# Altium PCB PCB(无CH340).pcbdoc
Units mil, origin at the board's own origin, x right, y up, seen from the top; angles counter-clockwise.
Board outline 3337 x 2275.93 mil, 2 copper layers (Top Layer, Bottom Layer); 49 components, 44 nets, 174 pads, 47 vias.
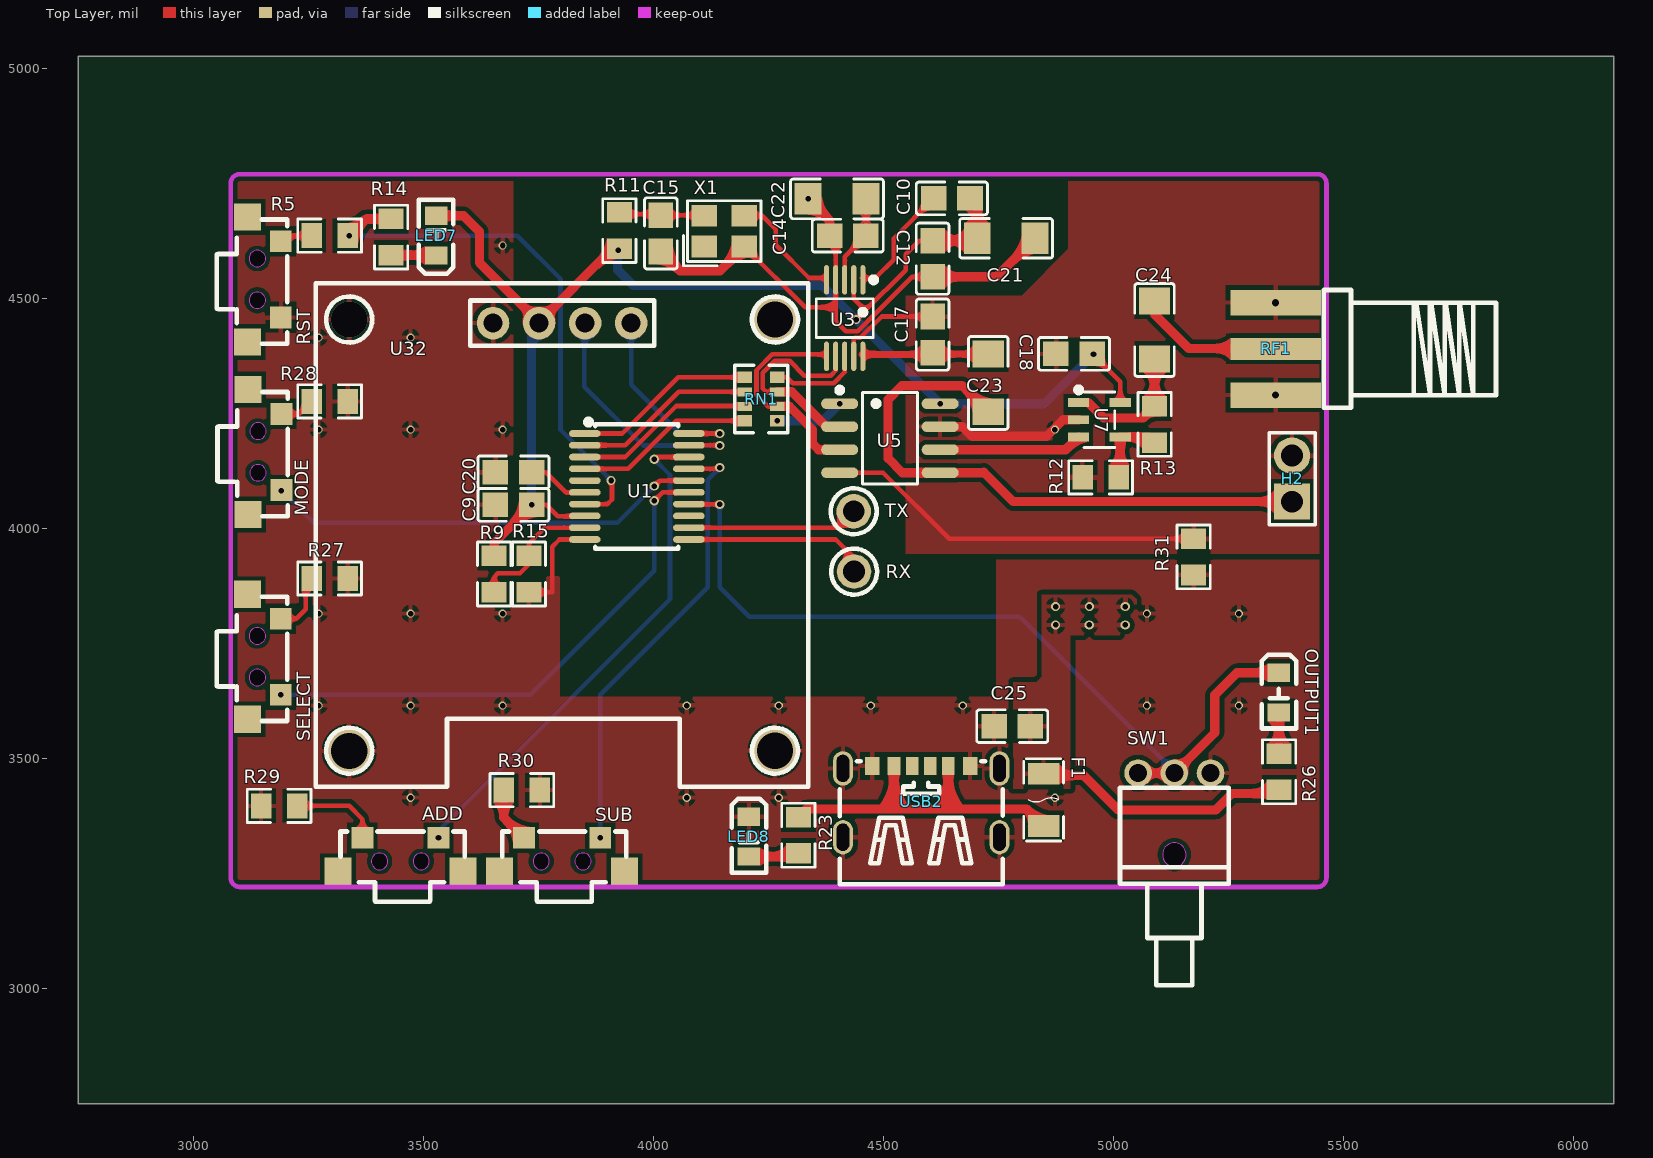
[diagram p0: Top Layer view]
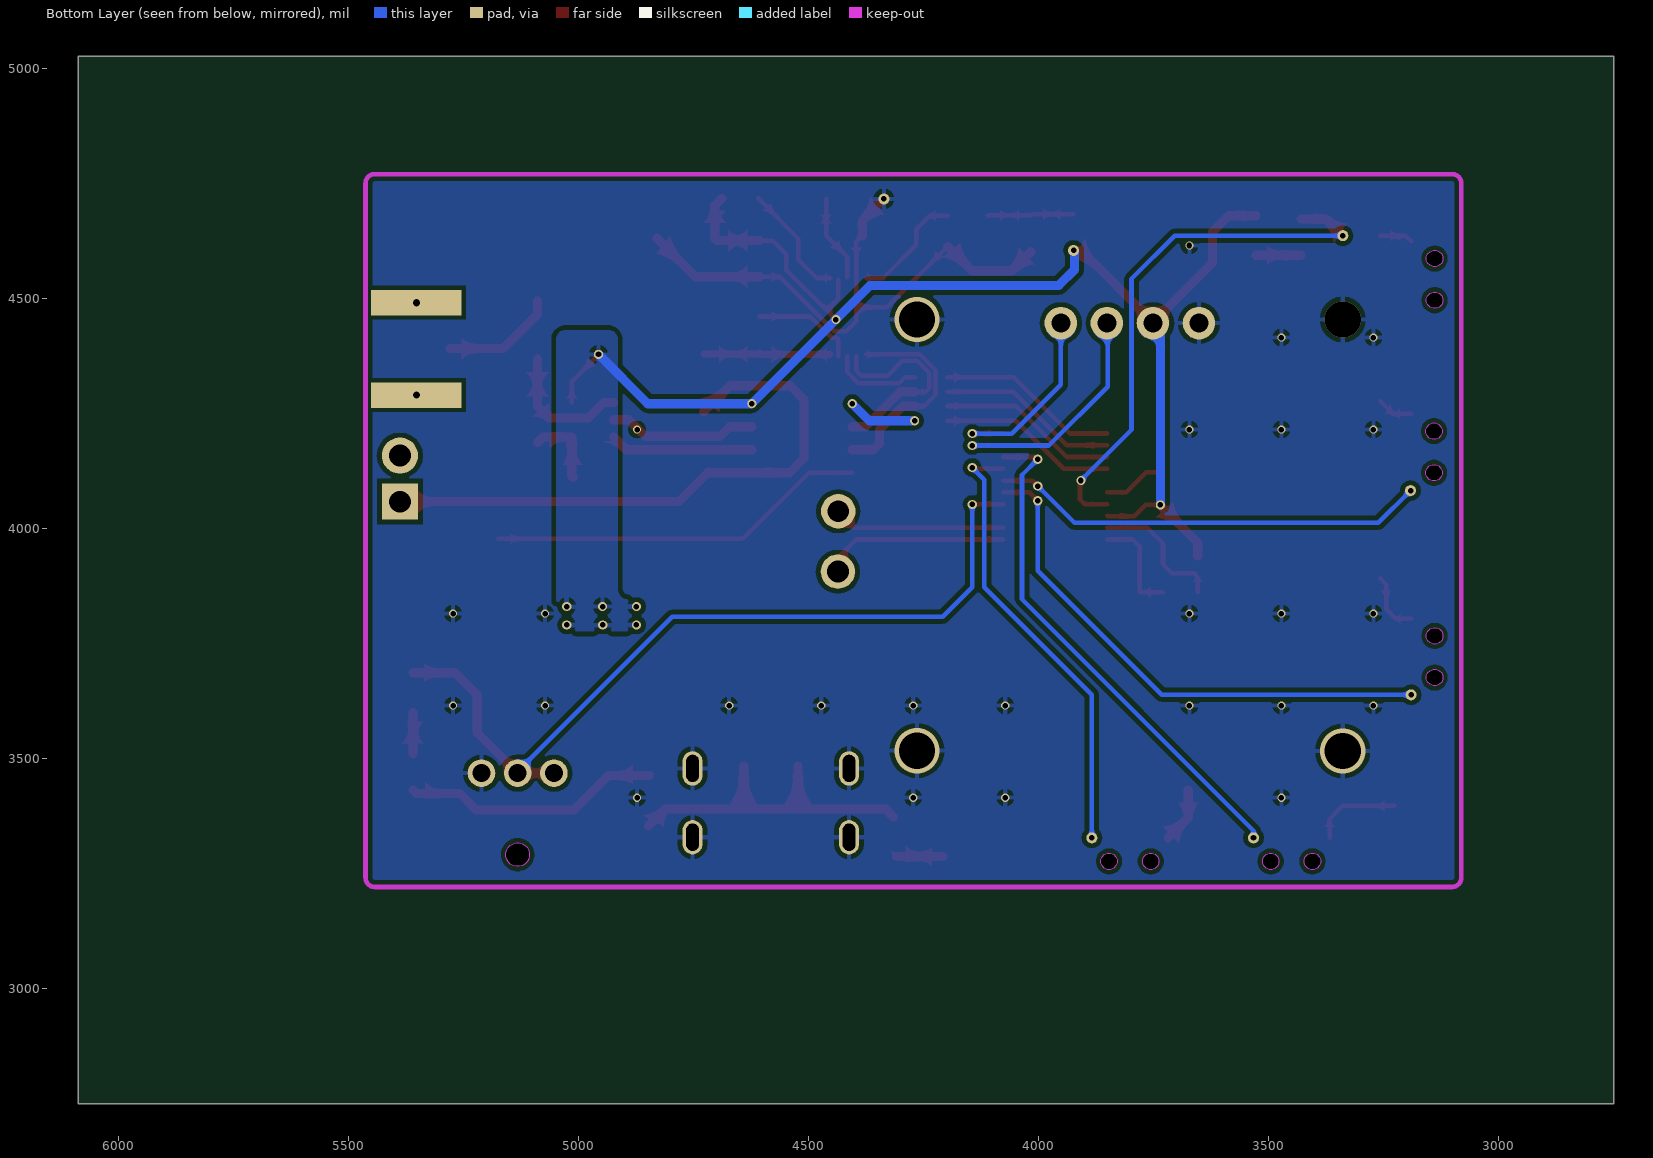
[diagram p1: Bottom Layer view, seen from below]

## Layer stack, top to bottom
Top Solder Mask Layer: solder mask 0.4, Solder Resist, Dk 3.5
Top Layer: signal copper 1.4
Dielectric1: dielectric 12.6, FR-4, Dk 4.8
Bottom Layer: signal copper 1.4
Bottom Solder Mask Layer: solder mask 0.4, Solder Resist, Dk 3.5

## Board outline
6087,2750 2750,2750 2750,5025.93 6087,5025.93

## Design rules (kind name [scope] priority, off if disabled: settings)
Clearance [All] p1: gap=10 ignorepadtopadclearanceinfootprint=FALSE except(0: Arc-Hole Track-Hole SMDPad-Hole THPad-Hole Via-Hole Fill-Hole Poly-Hole Region-Hole Text-Hole)
PolygonConnect [All] p1: connectstyle=Relief reliefconductorwidth=10 reliefentries=4 polygonreliefangle="90 Angle" airgapwidth=10
RoutingVias [All] p1: holewidth=28 width=50 viastyle="Through Hole" minholewidth=28 minwidth=50 maxholewidth=28 maxwidth=50
SolderMaskExpansion [All] p1: expansion=4 istentingtop=FALSE
Width [All] p1: maxlimit=10 minlimit=10 preferedwidth=10
30 further rules are at their usual default settings.

## Components (designator, comment, footprint, x,y, rotation, side; value= is the part's Value field where it differs from the comment)
ADD "TS-1087B-B2D2" KEY-SMD_4P-L7.8-W2.8-P4.20-EH 3450.23,3290.93 r180 top
C9 "0805B104K500NT" C0805 3695.86,4050.93 r0 top
C10 "0805B104K500NT" C0805 4648.64,4717.02 r180 top
C12 "0805B104K500NT" C0805 4606.72,4585.93 r90 top
C14 "0805B104K500NT" C0805 4422.33,4635.93 r0 top
C15 "0805B104K500NT" C0805 4016.16,4640.93 r90 top
C17 "0805B104K500NT" C0805 4606.72,4420.93 r270 top
C18 "0805B104K500NT" C0805 4914,4379.2 r180 top
C20 "0805B104K500NT" C0805 3695.86,4121.76 r0 top
C21 "CL31A106KBHNNNE" C1206 4766.48,4630.22 r180 top
C22 "CL31A106KBHNNNE" C1206 4399,4715.93 r0 top
C23 "CL31A106KBHNNNE" C1206 4727.64,4315.93 r270 top
C24 "CL31A106KBHNNNE" C1206 5089,4430.93 r90 top
C25 "0805B104K500NT" C0805 4779.75,3569.93 r0 top
F1 "nSMD010" F1206 4848,3409.93 r270 top
H2 "PZ254V-11-02P" HDR-TH_2P-P2.54-V-M 5388,4108 r90 top
LED7 "LED_B" LED_0805 3528,4638.06 r90 top
LED8 "LED_B" LED_0805 4207.22,3327.89 r270 top
MODE "TS-1087B-B2D2" KEY-SMD_4P-L7.8-W2.8-P4.20-EH 3155.3,4165.93 r90 top
OUTPUT1 "LED_B" LED_0805 5359,3640.9 r270 top
R5 "0805W8F1001T5E" R0805 3296.33,4635.93 r0 top
R9 "0805W8F1001T5E" R0805 3654,3900.73 r270 top
R11 "0805W8F1001T5E" R0805 3926,4647.14 r90 top
R12 "0805W8F1001T5E" R0805 4972.04,4110.93 r0 top
R13 "0805W8F1001T5E" R0805 5089,4225.81 r90 top
R14 "0805W8F1001T5E" R0805 3430,4632.96 r90 top
R15 "0805W8F1001T5E" R0805 3729.63,3900.73 r270 top
R23 "0805W8F1001T5E" R0805 4315.23,3333 r90 top
R26 "0805W8F1001T5E" R0805 5359.68,3470.93 r270 top
R27 "0805W8F1001T5E" R0805 3296.33,3890.93 r180 top
R28 "0805W8F1001T5E" R0805 3296.33,4275.93 r180 top
R29 "0805W8F1001T5E" R0805 3186.62,3396.93 r0 top
R30 "0805W8F1001T5E" R0805 3714,3430.93 r180 top
R31 "0805W8F0000T5E" R0805 5174.12,3937.93 r90 top
RF1 "KH-SMA-KE8-G" CONN-SMD_KH-SMA-KE8-G 5352,4389.93 r270 top
RN1 "4D03WGJ0331T5E" RES-ARRAY-SMD_0603-8P-L3.2-W1.6-BL 4234,4280.93 r270 top
RST "TS-1087B-B2D2" KEY-SMD_4P-L7.8-W2.8-P4.20-EH 3154,4540.93 r90 top
RX "RH-5000" TEST-TH_BD2.54-P1.4_RED 4436,3905.93 r0 top
SELECT "TS-1087B-B2D2" KEY-SMD_4P-L7.8-W2.8-P4.20-EH 3154,3720.93 r90 top
SUB "TS-1087B-B2D2" KEY-SMD_4P-L7.8-W2.8-P4.20-EH 3801.49,3290.93 r180 top
SW1 "XKB5858-Z-C" SW-TH_XKB5858-Z-C 5132,3467.93 r180 top
TX "RH-5000" TEST-TH_BD2.54-P1.4_RED 4435.36,4037.08 r0 top
U1 "STC8H8K64U-45I-TSSOP20" TSSOP-20_L6.5-W4.4-P0.65-LS6.5-BL 3964,4090.93 r270 top
U3 "AD9833BRMZ" MSOP-10_L3.0-W3.0-P0.50-LS5.0-BL 4415.68,4456.93 r180 top
U5 "MCP41010T-I/SN" SOIC-8_L4.9-W3.9-P1.27-LS6.0-BL 4514,4195.93 r270 top
U7 "CBM8051AST5" SOT-23-5_L3.0-W1.7-P0.95-LS2.8-BL 4969,4235.93 r270 top
U32 "HS96L03W2C03" OLED-TH_L27.8-W27.2-P2.54_C9900033791 3801.49,4445.93 r0 top
USB2 "TYPE-C 6P" TYPE-C-SMD_TYPE-C-6P 4581.83,3405.93 r0 top
X1 "SX32Y025000BK1T" CRYSTAL-SMD_4P-L3.2-W2.5-BL 4154,4645.93 r0 top

## Footprints (in the part's own frame and the unit in brackets; to place one, negate y for a bottom-side part, rotate by r counter-clockwise, add the part's x,y. Pads: shape width x height; smd on the part's side, far side on the other; paste and mask are expansions set on the pad)
C0805 [mm]
  rect 1.41x1.35 smd paste-100 mask+0.051: 1(-1,0) 2(1,0)
  silkscreen extent -1.96,-0.9 1.96,0.9
C1206 [mm]
  rect 1.485x1.728 smd paste-100 mask+0.051: 1(-1.593,0) 2(1.593,0)
  silkscreen extent -2.56,-1.09 2.56,1.09
CONN-SMD_KH-SMA-KE8-G [mm]
  rect 1.4x5 smd paste+0 mask+0.05: 1(-2.55,0) 2(2.55,0)
  rect 1.4x5 smd far side paste+0 mask+0.05: 3(-2.55,0) 4(2.55,0)
  rect 1.2x5 smd paste+0 mask+0.05: 5(0,0)
  silkscreen extent -3.25,2.67 3.25,12.19
CRYSTAL-SMD_4P-L3.2-W2.5-BL [mm]
  rect 1.4x1.2 smd mask+0.076: 1(-1.1,-0.85) 2(1.1,-0.85) 3(1.1,0.85) 4(-1.1,0.85)
  silkscreen extent -2.26,-1.91 2.03,1.68
F1206 [mm]
  rect 1.19x1.728 smd paste+0 mask+0.051: 1(-1.445,0) 2(1.445,0)
  silkscreen extent -2.27,-1.09 2.27,1.09
HDR-TH_2P-P2.54-V-M [mm]
  rect 2x2 hole 1.2 mask+0.076: 1(-1.27,0)
  round 2 hole 1.2 mask+0.076: 2(1.27,0)
  silkscreen extent -2.54,-1.27 2.54,1.27
KEY-SMD_4P-L7.8-W2.8-P4.20-EH [mm]
  rect 1.2x1.2 smd mask+0.076: 1(-2.101,-0.924) 2(2.101,-0.924)
  rect 1.5x1.5 smd mask+0.076: 3(-3.449,0.924) 4(3.449,0.924)
  Board Outline Layer board cut-out: -1.6,0.374 -1.6,0.285 -1.532,0.119 -1.405,-0.007 -1.24,-0.076 -1.06,-0.076 -0.895,-0.007 -0.769,0.119 -0.7,0.285 -0.7,0.374 -0.7,0.464 -0.769,0.629 -0.895,0.756 -1.06,0.824 -1.24,0.824 -1.405,0.756 -1.532,0.629 -1.6,0.464 -1.6,0.374
  Board Outline Layer board cut-out: 0.7,0.374 0.7,0.285 0.768,0.119 0.895,-0.007 1.06,-0.076 1.239,-0.076 1.405,-0.007 1.531,0.119 1.6,0.285 1.6,0.374 1.6,0.464 1.531,0.629 1.405,0.756 1.239,0.824 1.06,0.824 0.895,0.756 0.768,0.629 0.7,0.464 0.7,0.374
  silkscreen extent -3.55,-1.27 3.31,2.61
LED_0805 [mm]
  rect 1x1.25 smd paste+0 mask+0.051: 1(-1.15,0.005) 2(1.05,0.005)
  silkscreen extent -2.15,-0.94 1.93,0.97
MSOP-10_L3.0-W3.0-P0.50-LS5.0-BL [mm]
  oval 0.28x1.62 smd mask+0.076: 1(-1,-2.11) 2(-0.5,-2.11) 3(0,-2.11) 4(0.5,-2.11) 5(1,-2.11) 6(1,2.11) 7(0.5,2.11) 8(0,2.11) 9(-0.5,2.11) 10(-1,2.11)
  silkscreen extent -1.74,-2.26 1.58,1.07
OLED-TH_L27.8-W27.2-P2.54_C9900033791 [mm]
  round 1.8 hole 1.05 paste+0 mask+0.05: 1(-3.81,0) 2(-1.27,0) 3(1.27,0) 4(3.81,0)
  silkscreen extent -13.6,-25.6 13.6,2.2
R0805 [mm]
  rect 1.133x1.377 smd paste-100 mask+0.051: 1(-1,0) 2(1,0)
  silkscreen extent -1.76,-0.92 1.76,0.92
RES-ARRAY-SMD_0603-8P-L3.2-W1.6-BL [mm]
  rect 0.65x0.8 smd mask+0.076: 1(-1.2,-0.9) 4(1.2,-0.9) 5(1.2,0.9) 8(-1.2,0.9)
  rect 0.5x0.8 smd mask+0.076: 2(-0.4,-0.9) 3(0.4,-0.9) 6(0.4,0.9) 7(-0.4,0.9)
  silkscreen extent -1.87,-1.45 1.87,1.47
SOIC-8_L4.9-W3.9-P1.27-LS6.0-BL [mm]
  oval 0.588x2.045 smd mask+0.076: 1(-1.905,-2.772) 2(-0.635,-2.772) 3(0.635,-2.772) 4(1.905,-2.772) 5(1.905,2.772) 6(0.635,2.772) 7(-0.635,2.772) 8(-1.905,2.772)
  silkscreen extent -2.8,-2.92 2.53,1.52
SOT-23-5_L3.0-W1.7-P0.95-LS2.8-BL [mm]
  rect 0.49x1.157 smd mask+0.076: 1(-0.95,-1.154) 2(0,-1.154) 3(0.95,-1.154)
  rect 0.49x1.175 smd mask+0.076: 4(0.95,1.154) 5(-0.95,1.154)
  silkscreen extent -1.8,-1.29 1.53,0.85
SW-TH_XKB5858-Z-C [mil]
  round 60 hole 39.37 mask+3: 1(78.74,0) 2(0,0) 3(-78.74,0)
  Board Outline Layer board cut-out: -25.59,177.16 -25.59,173.79 -23.85,167.28 -20.48,161.45 -15.71,156.68 -9.88,153.31 -3.37,151.57 3.37,151.57 9.88,153.31 15.71,156.68 20.48,161.45 23.85,167.28 25.59,173.79 25.59,177.16 25.59,180.53 23.85,187.04 20.48,192.87 15.71,197.64 9.88,201.01 3.37,202.75 -3.37,202.75 -9.88,201.01 -15.71,197.64 -20.48,192.87 -23.85,187.04 -25.59,180.53 -25.59,177.16
  silkscreen extent -118,31 118,461
TEST-TH_BD2.54-P1.4_RED [mm]
  round 1.9 hole 1.2 mask+0.076: 1(0,0)
  silkscreen extent -1.27,-1.27 1.27,1.27
TSSOP-20_L6.5-W4.4-P0.65-LS6.5-BL [mil]
  oval 14.33x68.58 smd mask+3: 1(-115.16,-113.03) 2(-89.57,-113.03) 3(-63.98,-113.03) 4(-38.39,-113.03) 5(-12.79,-113.03) 6(12.8,-113.03) 7(38.39,-113.03) 8(63.98,-113.03) 9(89.57,-113.03) 10(115.16,-113.03) 11(115.16,113.03) 12(89.57,113.03) 13(63.98,113.03) 14(38.39,113.03) 15(12.8,113.03) 16(-12.79,113.03) 17(-38.39,113.03) 18(-63.98,113.03) 19(-89.57,113.03) 20(-115.16,113.03)
  silkscreen extent -146,-111 135,90
TYPE-C-SMD_TYPE-C-6P [mm]
  oval 1.1x1.9 hole 0.7 slot 1.5 at 90 deg mask+0.076: 7(-4.32,-1.963) 7(-4.32,1.838) 7(4.32,-1.963) 7(4.32,1.838)
  rect 0.7x1 smd paste-100 mask+0.051: A5(-0.5,1.963) A9(1.5,1.963) B5(0.5,1.963) B9(-1.5,1.963)
  rect 0.8x1 smd paste-100 mask+0.051: A12(2.7,1.963) B12(-2.7,1.963)
  silkscreen extent -4.5,-4.56 4.5,2.24

## Free pads (board coordinates)
  round 20 hole 12 mask+3: 21(3735.23,4050.93) 27(4269.44,4233.69) 28(4404.85,4270.93) 28(4623.15,4270.93) 28(4956.36,4377.93)
  round 24 hole 12 mask+3: 22(3338.65,4635.93) 23(3191.67,4081.93) 24(3190.37,3638.23) 25(3532.93,3327.3) 26(3884.19,3327.3) 29(3924,4603.93)

## Via types
v1: diameter 17.72, hole 12.01, Top Layer to Bottom Layer, 25 vias
v2: diameter 20, hole 12.01, Top Layer to Bottom Layer, 15 vias
v3: diameter 98.43, hole 78.74, Top Layer to Bottom Layer, 3 vias
v4: diameter 31.5, hole 15.75, Top Layer to Bottom Layer, 2 vias
v5: diameter 78.74, hole 78.74, Top Layer to Bottom Layer, 1 vias
v6: diameter 24, hole 12, Top Layer to Bottom Layer, 1 vias

## Nets (pads, with @x,y where several pads share a name; then routed paths per layer and width w, separated by ;. In a path a pad name is that pad's centre, name@x,y a point inside that pad or via, vN(x,y) a via of type N, cw(c..) or ccw(c..) an arc to the next point about the centre after c; other vN are vias at no path point)
$1N2559: R5.1 RST.2 | length 71.7
  Top Layer w10: RST.2 3202.67,4635.93 R5.1
$1N4940: R9.2 R15.1 U1.9 | length 301
  Top Layer w10: R9.2 3654,3893.93 3662,3901.93 3710,3901.93 3729.63,3921.56 R15.1 3729.63,3967.56 3763.43,4001.36 U1.9
$1N4975: LED7.1 R14.1 | length 98.1
  Top Layer w20: R14.1 3526.98,4593.59 LED7.1
$1N5128: C20.2 U1.6 | length 133.8
  Top Layer w10: C20.2 3766.17,4121.76 3809.8,4078.13 U1.6
$1N6710: LED8.2 R23.1 | length 110.7
  Top Layer w10: R23.1@4308.15,3286.55 R23.1
  Top Layer w20: LED8.2 R23.1@4308.15,3286.55
$2N1265: C10.2 U3.1 | length 254.4
  Top Layer w10: U3.1@4453.37,4544 4482.07,4544 4522,4583.93 4522,4629.75 C10.2
$2N1528: C14.2 C22.2 U3.3 | length 188.9
  Top Layer w10: U3.3@4416,4546 4416,4590.23 C14.2 C22.2
$2N1564: U3.5 X1.3 | length 253.3
  Top Layer w10: X1.3 4236.53,4679.4 4266,4649.93 4266,4615.93 4338,4543.93 ; 4338.07,4544 U3.5@4374.63,4544
$2N1666: C15.2 R11.2 X1.4 | length 188.1
  Top Layer w10: R11.2@3924,4682.74 4013.72,4682.74 C15.2 4109.78,4680.3 X1.4
$2N1783: C17.2 C23.1 U3.10 | length 277
  Top Layer w10: C17.2 C17.2@4609.65,4378.63
  Top Layer w15: U3.10@4453.37,4377.86 4603.02,4377.86 C17.2 ; C17.2@4609.65,4378.63 C23.1
$2N1802: U5.6 U7.3 | length 311.9
  Top Layer w20: U5.6 4895.98,4170.93 U7.3
$2N1974: R12.2 R13.1 U7.4 | length 168.4
  Top Layer w20: R12.2 5014.42,4113.94 U7.4 5076.91,4198.53 R13.1
$2N2021: C24.1 R13.2 U7.1 | length 292.8
  Top Layer w20: U7.1 4944.6,4273.33 4978,4239.93 5063.75,4239.93 R13.2 C24.1
$4N4589: OUTPUT1.2 R26.1 | length 89.5
  Top Layer w20: OUTPUT1.2 5359.68,3599.08 R26.1
$4N4834: R30.2 SUB.2 | length 121.9
  Top Layer w20: R30.2 3674.63,3371.46 SUB.2
$4N4886: ADD.2 R29.2 | length 194.5
  Top Layer w10: R29.2 3339,3396.93 3367.53,3368.4 ADD.2
$4N4938: MODE.2 R28.2 | length 77.9
  Top Layer w10: MODE.2@3190.37,4248.63 3229.66,4248.63 R28.2
$4N4990: R27.2 SELECT.2 | length 134.4
  Top Layer w10: SELECT.2 3223.7,3803.63 3244,3823.93 3244,3877.97 R27.2
AGND: C17.1 C18.2 H2.2 R12.1 R31.2 RF1.1 RF1.2 RF1.3 RF1.4 U3.9 U5.4 U5.7 U7.2 | length 1381.9
  Top Layer w10: U5.4 4499,4120.93 4642.63,3977.3 R31.2 ; U3.9 4435.36,4411.29 4438,4413.93 4449.8,4413.93 4496.17,4460.3 C17.1
  Top Layer w20: U5.7 4671,4220.93 4692,4199.93 4854.8,4199.93 4890.8,4235.93 U7.2
  other v1: 4872.39,4214.62
  other v4: 5352,4289.54 5352,4490.33
CS: pad.27 pad.28@4404.85,4270.93 RN1.5 U5.1 | length 150.8
  Bottom Layer w20: pad.27 4367.61,4233.69 pad.28@4404.85,4270.93
FSYNC: RN1.8 U3.8 | length 195.7
  Top Layer w10: RN1.8 4290.18,4328.17 4302.83,4315.53 4391.6,4315.53 4415.68,4339.61 U3.8
GND: C9.1 C12.1 C14.1 C15.1 C20.1 C21.1 C22.1 C25.1 LED8.1 R15.2 R27.1 R28.1 R29.1 R30.1 R31.1 RST.1 SW1.3 U1.10 U3.4 U32.1 USB2.7 USB2.A12 USB2.B12 X1.2 | length 1516.9
  Top Layer w10: R15.2 3780,3861.36 3780,3959.93 3795.84,3975.77 U1.10 ; X1.2 4329.57,4480.2 4395.99,4480.2 ; C14.1 4395.99,4622.9 U3.4 4395.99,4480.2 ; C12.1 4562.63,4546.56 4444,4427.93 4418,4427.93 4395.99,4449.94 4395.99,4480.2
  Top Layer w20: C15.1 4057.79,4559.93 4144.77,4559.93 X1.2 ; v6(4336.3,4715.93) 4382.96,4669.27 C14.1 ; C12.1 4745.52,4546.56 C21.1
  other v1: 3472.39,3414.62 4072.39,3414.62 4272.39,3414.62 4872.39,3414.62 3272.39,3614.62 3472.39,3614.62 3672.39,3614.62 4072.39,3614.62 4272.39,3614.62 4472.39,3614.62 4672.39,3614.62 5072.39,3614.62 5272.39,3614.62 3272.39,3814.62 3472.39,3814.62 3672.39,3814.62 5072.39,3814.62 5272.39,3814.62 3272.39,4214.62 3472.39,4214.62 3672.39,4214.62 3272.39,4414.62 3472.39,4414.62 3672.39,4614.62
  other v3: 3339,3515.93 4264.09,3516.8 4264.09,4453.8
  other v5: 3338.89,4453.8
P1.0: U1.20 U32.4 | length 437.2
  Top Layer w10: U1.20 4143.84,4206.09 v2(4144,4205.93)
  Bottom Layer w10: U32.4 3951.49,4312.44 4058,4205.93 v2(4144,4205.93)
P1.1: U1.19 U32.3 | length 552.8
  Top Layer w10: U1.19 4143.43,4180.5 v2(4144,4179.93)
  Bottom Layer w10: U32.3 3850,4444.44 3850,4307.93 3978,4179.93 v2(4144,4179.93)
P1.3: U1.5
P1.4: RN1.1 U1.1 | length 398.2
  Top Layer w10: U1.1 3932.16,4206.09 4054.24,4328.17 RN1.1
P1.5: RN1.2 U1.2 | length 395.7
  Top Layer w10: U1.2 3938.57,4180.5 4054.75,4296.68 RN1.2
P1.6: RN1.3 U1.3 | length 393.9
  Top Layer w10: U1.3 3938.98,4154.91 4050,4265.93 4197.81,4265.93 RN1.3
P1.7: RN1.4 U1.4 | length 390.8
  Top Layer w10: U1.4 3945.39,4129.32 4049.76,4233.69 RN1.4
P3.2: U1.13
P3.3: OUTPUT1.1 SW1.1 SW1.2 U1.14 | length 1848.7
  Top Layer w10: U1.14 4077.64,4051.93 v2(4144,4051.93)
  Top Layer w20: SW1.1 SW1.2 5220,3555.93 5220,3637.93 5268.25,3686.18 OUTPUT1.1
  Bottom Layer w10: v2(4144,4051.93) 4144,3871.93 4208,3807.93 4796,3807.93 5130.52,3473.41 SW1.2@5130.52,3467.93
P3.4: pad.24 SELECT.1 U1.15 | length 1157.9
  Top Layer w10: v2(4002,4059.93) 4020.2,4078.13 U1.15
  Bottom Layer w10: pad.24 3732.3,3638.23 4002,3907.93 v2(4002,4059.93)
P3.5: MODE.1 pad.23 U1.16 | length 954.2
  Top Layer w10: v2(4002,4091.93) 4013.79,4103.72 U1.16
  Bottom Layer w10: pad.23@3190.37,4083.23 pad.23 3261.67,4011.93 3922,4011.93 v2(4002,4091.93)
P3.6: pad.26 SUB.1 U1.17 | length 980.3
  Top Layer w10: U1.17 4141.39,4129.32 v2(4144,4131.93)
  Bottom Layer w10: pad.26 3884.19,3638.12 4118,3871.93 4118,4105.93 v2(4144,4131.93)
P3.7: ADD.1 pad.25 U1.18 | length 1122.2
  Top Layer w10: v2(4002,4149.93) 4006.98,4154.91 U1.18
  Bottom Layer w10: pad.25 3532.93,3342.86 4036,3845.93 4036,4115.93 v2(4002,4149.93)
RST: pad.22 R5.2 R14.2 U1.7 | length 1193.7
  Top Layer w10: U1.7 3900,4052.54 3910,4062.54 3910,4101.93 v2(3908,4103.93)
  Top Layer w20: pad.22 3375.05,4672.33 R14.2
  Bottom Layer w10: pad.22 3704,4635.93 3798,4541.93 3798,4213.93 v2(3908,4103.93)
RXD: RX.1 U1.11 | length 405.5
  Top Layer w10: U1.11 4396.16,3975.77 4436,3935.93 RX.1
SCLK: RN1.7 U3.7 U5.2 | length 453.4
  Top Layer w10: RN1.7 4268.69,4295.93 4246,4295.93 4238,4303.93 4238,4338.13 4263.73,4363.86 4296.07,4363.86 4328,4331.93 4384.96,4331.93 4396,4342.97 U3.7
  Top Layer w20: RN1.7 4300.42,4296.68 4376.17,4220.93 U5.2
SDATA: RN1.6 U3.6 U5.3 | length 466.7
  Top Layer w10: RN1.6 4248.69,4265.18 4224,4289.87 4224,4343.93 4257.93,4377.86 U3.6@4374.63,4377.86
  Top Layer w20: RN1.6 4295.18,4265.18 4346,4214.36 4346,4183.93 4359,4170.93 U5.3
TXD: TX.1 U1.12 | length 373.1
  Top Layer w10: U1.12 4399.64,4001.36 TX.1
VBUS: F1.2 R23.2 USB2.A9 USB2.B9 | length 741.9
  Top Layer w20: R23.2 4332.79,3389.93 4522.77,3389.93 ; USB2.B9 4522.77,3389.93 ; USB2.A9 4640.88,3389.93 ; F1.2 4811.11,3389.93 4640.88,3389.93 ; 4522.77,3389.93 4640.88,3389.93
VCC: C9.2 C10.1 C12.2 C18.1 C21.2 C25.2 F1.1 LED7.2 pad.21 pad.28@4623.15,4270.93 pad.28@4956.36,4377.93 pad.29 R9.1 R11.1 R26.2 U1.8 U3.2 U5.8 U7.5 U32.2 | length 3740.6
  Top Layer w10: pad.21 3767,4050.93 3792,4025.93 3849.95,4025.93 U1.8 ; R11.1@3907.56,4604 pad.29@3924,4604 ; v2@4435.36,4458.73 v2(4440.47,4453.61) 4460.38,4473.52 ; U3.2 4435.36,4498.54 4460.38,4473.52 ; C12.2 4577.37,4625.3 4548,4595.93 4548,4561.14 4460.38,4473.52 ; C18.1 5014.42,4318.15 U7.5
  Top Layer w20: LED7.2 3587.32,4679.4 3622,4644.72 3622,4577.42 U32.2@3751.49,4447.93 ; R9.1 3654,3968.39 3735.23,4049.62 pad.21 ; U32.2 U32.2@3751.49,4447.93 ; R11.1@3907.56,4604 U32.2@3751.49,4447.93 ; C12.2 4698.86,4625.3 C21.2 4703.78,4701.25 C10.1 ; F1.1@4845.72,3462.82 4935.11,3462.82 5010,3387.93 5222,3387.93 5258,3423.93 5352.05,3423.93 R26.2
  Bottom Layer w20: pad.21 3735.23,4431.67 U32.2@3751.49,4447.93 ; pad.29@3922,4601.93 3922,4561.93 3956,4527.93 4366.15,4527.93 v2(4440.47,4453.61) 4623.15,4270.93 4849.36,4270.93 pad.28@4956.36,4377.93
  other v2: 4874,3789.93 4947.1,3789.93 5025.42,3789.93 4874,3829.93 4947.51,3829.93 5025.42,3829.93
VOUT: C24.2 RF1.5 | length 249.1
  Top Layer w20: C24.2 5089,4465.35 5163.41,4390.94 RF1.5@5279,4390.94
VOUTS: C23.2 H2.1 U5.5 | length 1299.3
  Top Layer w20: C23.2 4670.94,4309.93 4540,4309.93 4510,4279.93 4510,4151.93 4541,4120.93 U5.5 4717,4120.93 4718,4121.93 4781.93,4058 H2.1
pads on no net: ADD.3 ADD.4 MODE.3 MODE.4 RST.3 RST.4 SELECT.3 SELECT.4 SUB.3 SUB.4 USB2.A5 USB2.B5 X1.1

## Polygon pours and split planes (outlines as drawn)
VCC on Bottom Layer "Bottom Layer-VCC" (solid, remove dead copper, pour order 0): 4914,3865.93 cw(c4894,3865.93) 4894,3845.93 4868,3845.93 ccw(c4868,3825.93) 4848,3825.93 4848,3795.99 ccw(c4868,3795.99) 4868,3775.99 5028,3775.99 ccw(c5028,3795.99) 5048,3795.99 5048,4410.93 ccw(c5028,4410.93) 5028,4430.93 4935,4430.93 ccw(c4935,4410.93) 4915,4410.93 4915,3866.93
GND on Bottom Layer "Bottom Layer-GND" (solid, remove dead copper, pour order 4): 3000,4775.93 5468,4775.93 5468,3213.93 3002,3213.93 3000,3215.93
VCC on Top Layer "Top Layer-VCC" (solid, remove dead copper, pour order 1): 5040,3855.93 5050,3845.93 5050,3767.93 4906,3767.93 4906,3433.93 4782,3433.93 4782,3665.93 4832,3665.93 4844,3677.93 4844,3855.93
GND on Top Layer "Top Layer-GND" (solid, remove dead copper, pour order 2): 3072.39,4771.93 3695.29,4771.93 3695.29,3898.7 3692.52,3895.93 3794,3895.93 3796,3893.93 3796,3633.93 4744.73,3633.93 4745.06,3931.93 5466,3931.93 5466,3214.62 3072.39,3214.62
GND on Top Layer "Top Layer-GND 1" (solid, remove dead copper, pour order 3): 4422,4596.23 4422,4595.7 4423.84,4598.07
AGND on Top Layer "Top Layer-AGND" (solid, remove dead copper, pour order 5): 4548,4505.93 4800,4505.93 4902,4607.93 4902,4769.93 4904,4771.93 5462,4771.93 5466,4775.93 5466,3944.31 4548,3944.31

## Keep-outs
Board Outline Layer:
  lines w10: 3081.41,3240.62 ccw(c3101.41,3240.62) 3101.41,3220.62 5442.71,3220.62 ccw(c5442.71,3240.62) 5462.71,3240.62 5462.71,4749.85 ccw(c5442.71,4749.85) 5442.71,4769.85 3101.41,4769.85 ccw(c3101.41,4749.85) 3081.41,4749.85 3081.41,3240.62